# Altium PCB WCTopping.PcbDoc (part 1 of 2)
Units mil, origin at the board's own origin, x right, y up, seen from the top; angles counter-clockwise.
Board outline 6000 x 4000 mil, 2 copper layers (Top Layer, Bottom Layer); 59 components, 76 nets, 281 pads, 0 vias.
Unrouted connection lines stored in the file: 177.
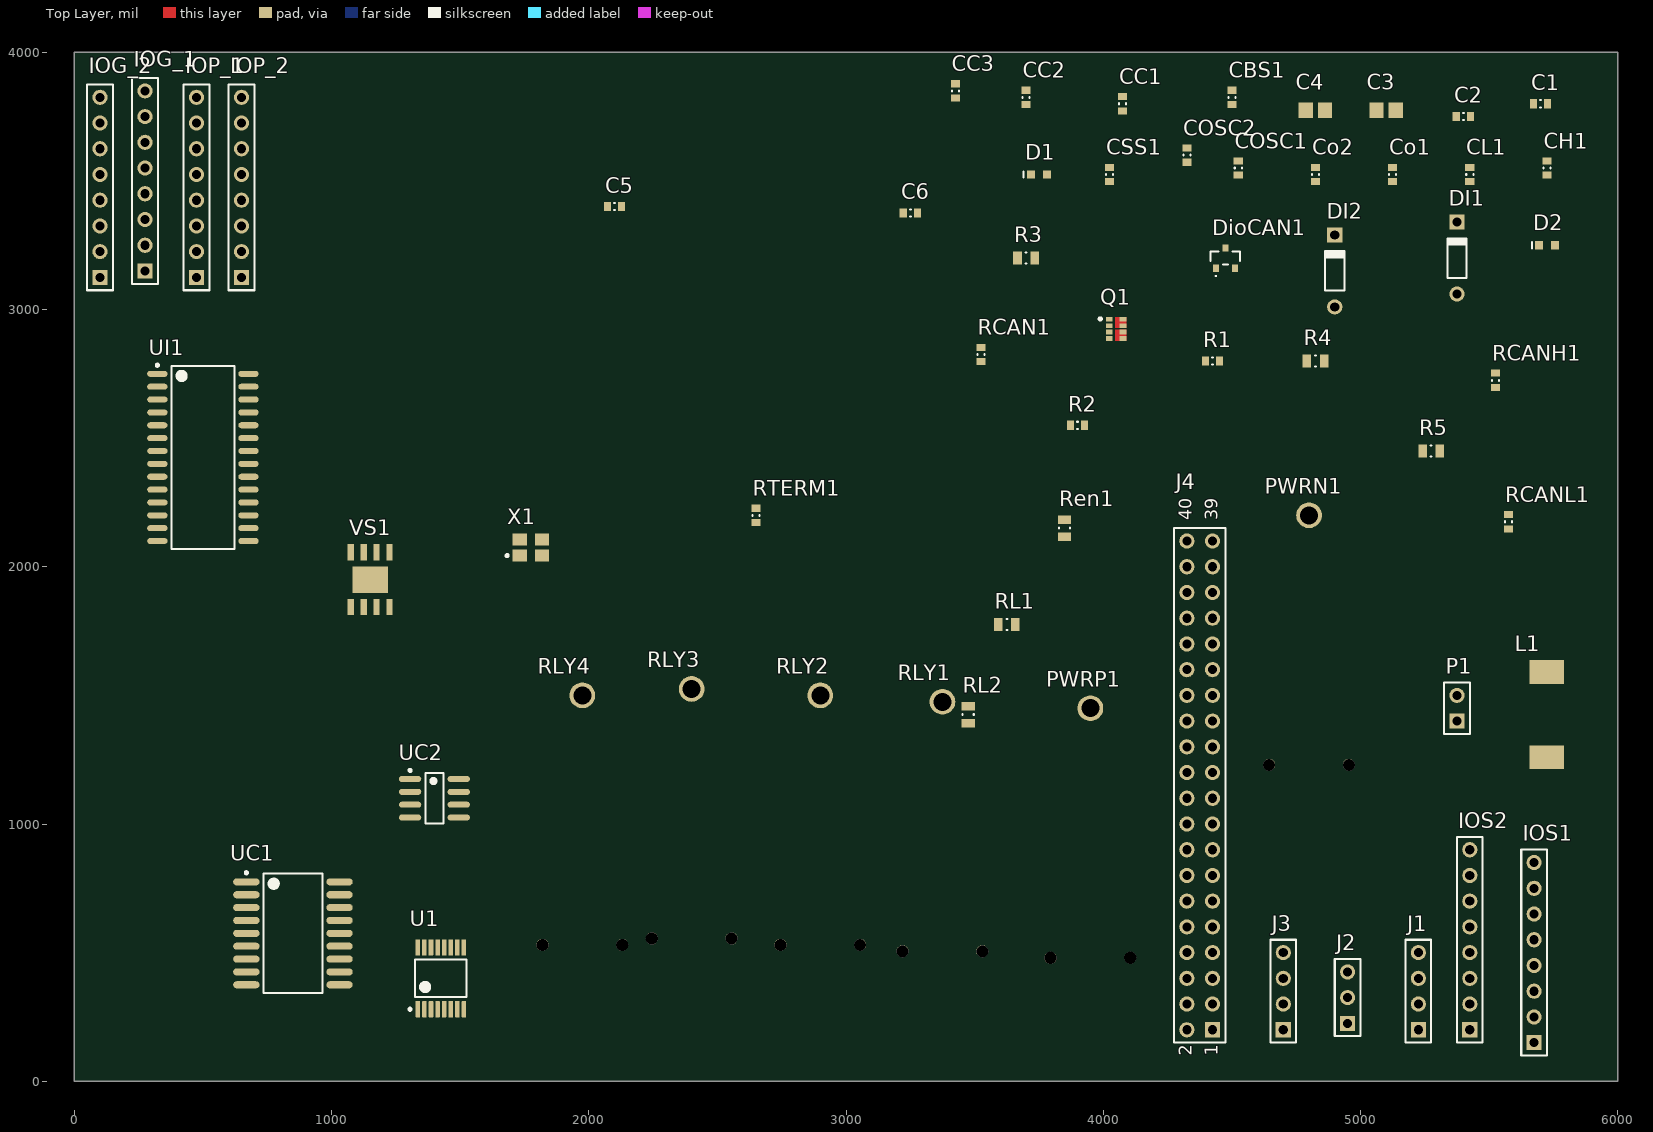
[diagram p0: Top Layer view]
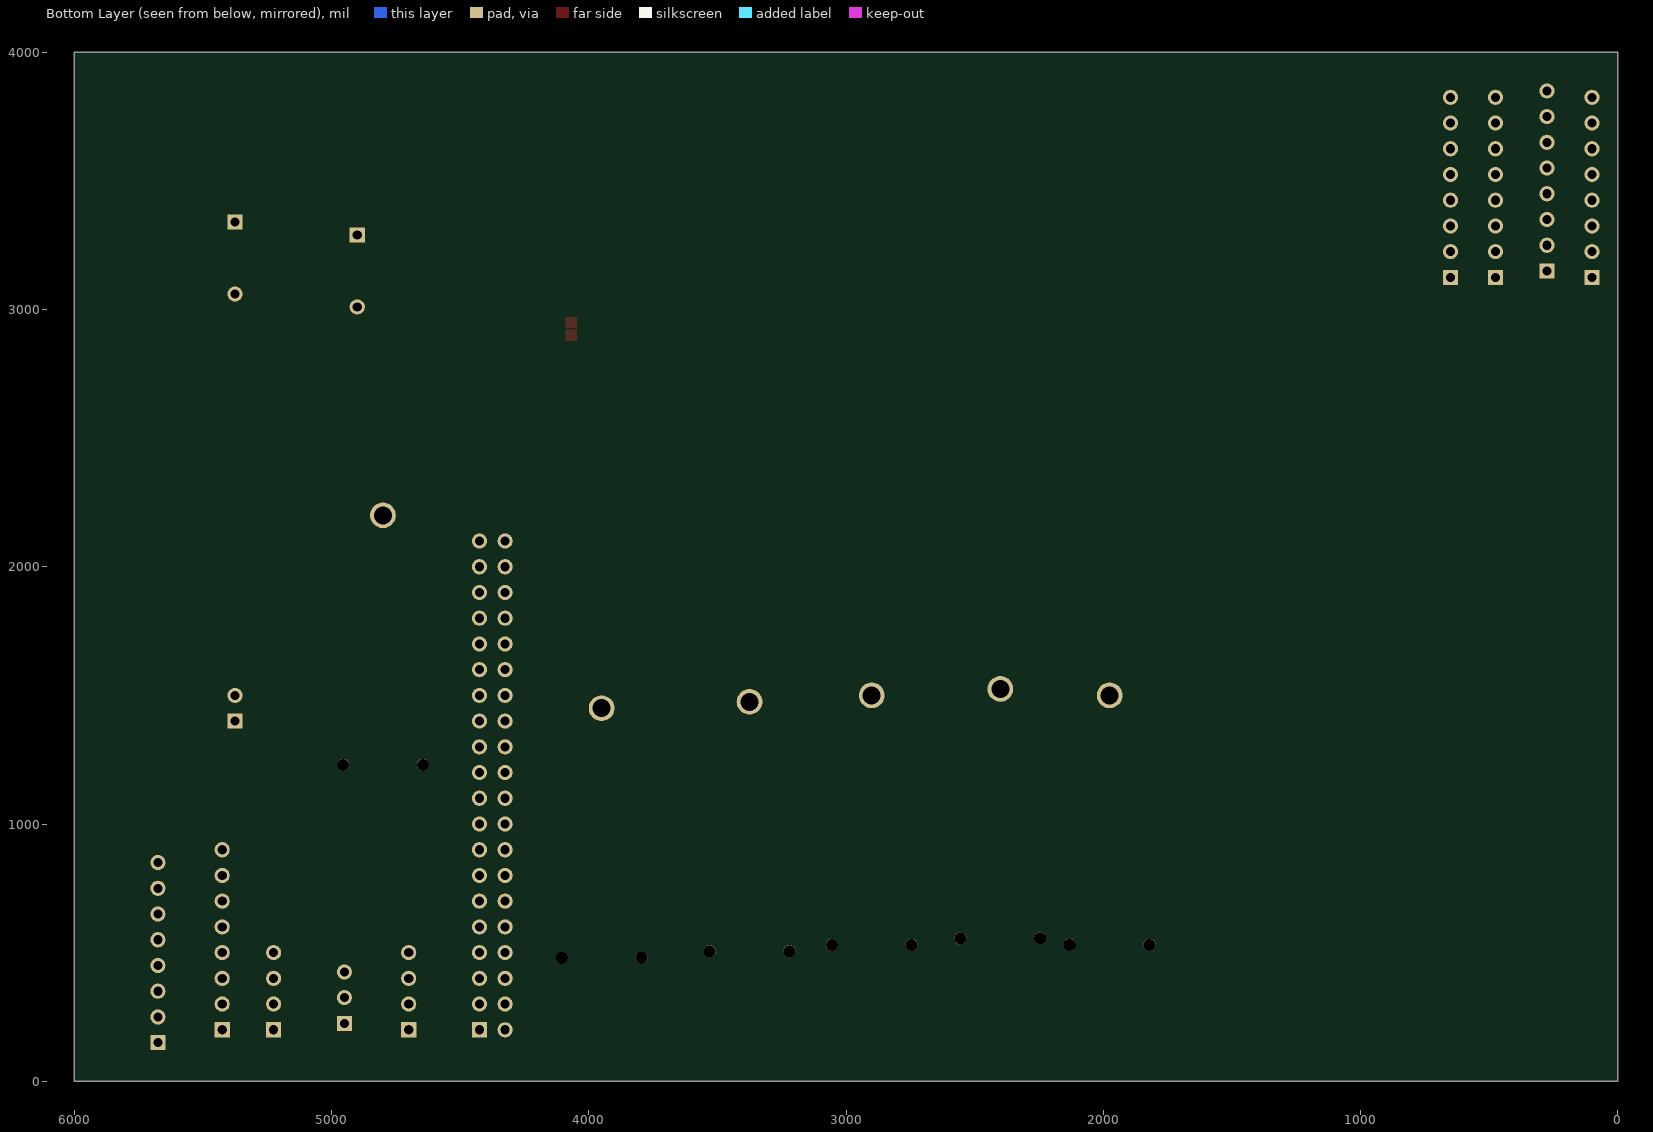
[diagram p1: Bottom Layer view, seen from below]

## Layer stack, top to bottom
Top Solder: solder mask 0.4, Solder Resist, Dk 3.5
Top Layer: signal copper 1.4
Dielectric 1: dielectric 12.6, FR-4, Dk 4.8
Bottom Layer: signal copper 1.4
Bottom Solder: solder mask 0.4, Solder Resist, Dk 3.5

## Board outline
0,0 6000,0 6000,4000 0,4000

## Design rules (kind name [scope] priority, off if disabled: settings)
Clearance [All] p1: gap=10 ignorepadtopadclearanceinfootprint=FALSE except(0: Arc-Hole Track-Hole SMDPad-Hole THPad-Hole Via-Hole Fill-Hole Poly-Hole Region-Hole Text-Hole)
PolygonConnect [All] p1: connectstyle=Relief reliefconductorwidth=10 reliefentries=4 polygonreliefangle="90 Angle" airgapwidth=10
RoutingVias [All] p1: holewidth=28 width=50 viastyle="Through Hole" minholewidth=28 minwidth=50 maxholewidth=28 maxwidth=50
SolderMaskExpansion [All] p1: expansion=4 istentingtop=FALSE
Width [All] p1: maxlimit=10 minlimit=10 preferedwidth=10
30 further rules are at their usual default settings.

## Classes and differential pairs
component class CAN_Interface: CC1 CC2 CH1 CL1 COSC1 COSC2 DioCAN1 P1 R1 R2 RCAN1 RCANH1 RCANL1 RTERM1 UC2 X1
component class Digital_IO: C1 C2 IOG_1 IOG_2 IOP_1 IOP_2 IOS1 IOS2 J1 J2 J3 UI1
component class "Power Supply": C3 C4 CBS1 CC3 Co1 Co2 CSS1 L1 PWRN1 PWRP1 R3 R4 R5 Ren1 VS1
component class Processor_Interface: C5 C6 J4
component class Relay_IO: D1 D2 DI1 DI2 Q1 RL1 RL2 RLY1 RLY2 RLY3 RLY4 U1
net class RELAY[1..2]: RELAY1 RELAY2

## Components (designator, comment, footprint, x,y, rotation, side; value= is the part's Value field where it differs from the comment)
C1 "100nF 50V" 0603C_L 5700,3800 r0 top
C2 "100nF 50V" 0603C_L 5400,3750 r0 top
C3 "10µF" CAPC2013X135X45ML10T25 5100,3775 r0 top
C4 "10µF" CAPC2013X135X45ML10T25 4825,3775 r0 top
C5 "100nF 50V" 0603C_L 2100,3400 r0 top
C6 "100nF 50V" 0603C_L 3250,3375 r0 top
CBS1 "10000pF 50V 0603" 0603C_L 4500,3825 r90 top
CC1 "0.1uF" 0603C_L 4075,3800 r90 top
CC2 "0.1uF" 0603C_L 3700,3825 r90 top
CC3 "3900pF" 0603C_L 3425,3850 r90 top
CH1 "560pF 25V 0603" 0603C_L 5725,3550 r90 top
CL1 "560pF 25V 0603" 0603C_L 5425,3525 r90 top
Co1 "22uF" 0603C_L 5125,3525 r90 top
Co2 "22uF" 0603C_L 4825,3525 r90 top
COSC1 "22pF" 0603C_L 4525,3550 r90 top
COSC2 "22pF" 0603C_L 4325,3600 r90 top
CSS1 "100nF 50V" 0603C_L 4025,3525 r90 top
D1 "LED Red" 0603_A 3750,3525 r0 top
D2 "LED Red" 0603_A 5725,3250 r0 top
DI1 "100V 1A Fast Diode" DO-35 5375,3200 r90 top
DI2 "100V 1A Fast Diode" DO-35 4900,3150 r90 top
DioCAN1 "100V 1A Fast Diode" SOT23 4475,3200 r90 top
IOG_1 "Header 8" HDR1X8 275,3150 r90 top
IOG_2 "Header 8" HDR1X8 100,3125 r90 top
IOP_1 "Header 8" HDR1X8 475,3125 r90 top
IOP_2 "Header 8" HDR1X8 650,3125 r90 top
IOS1 "Header 8" HDR1X8 5675,150 r90 top
IOS2 "Header 8" HDR1X8 5425,200 r90 top
J1 "Header 4" HDR1X4 5225,200 r90 top
J2 "Header 3" HDR1X3 4950,225 r90 top
J3 "Header 4" HDR1X4 4700,200 r90 top
J4 "Header 20X2" HDR2X20 4425,200 r90 top
L1 "10uH" IND_1 5725,1425 r90 top
P1 "Header 2" HDR1X2 5375,1400 r90 top
PWRN1 "BLK_PCB_RHT" Anderson_BLK_RHT_BOT 4800,2200 r90 top
PWRP1 "RED_PCB_RHT" Anderson_Red_RHT_BOT 3950,1450 r90 top
Q1 "NTHD4508NT1" ONSC-CHIPFET-8-1206A-03_S2_V 4050,2925 r0 top
R1 "10K 0603" 0603_L 4425,2800 r0 top
R2 "22K" 0603_L 3900,2550 r0 top
R3 "#NAME?" 0805_L 3700,3200 r0 top
R4 "10 kOhms" 0805_L 4825,2800 r0 top
R5 "6.8 kOhms" 0805_L 5275,2450 r0 top
RCAN1 "4.7K" 0603_L 3525,2825 r90 top
RCANH1 "100" 0603_L 5525,2725 r90 top
RCANL1 "100" 0603_L 5575,2175 r90 top
Ren1 "100K 0805" 0805_L 3850,2150 r90 top
RL1 "1K 0805" 0805_L 3625,1775 r0 top
RL2 "1K 0805" 0805_L 3475,1425 r90 top
RLY1 "Anderson-1Pin RED_PCB_RHT" Anderson_Red_RHT_BOT 3375,1475 r90 top
RLY2 "Anderson-1Pin BLK_PCB_RHT" Anderson_BLK_RHT_BOT 2900,1500 r90 top
RLY3 "Anderson-1Pin RED_PCB_RHT" Anderson_Red_RHT_BOT 2400,1525 r90 top
RLY4 "Anderson-1Pin BLK_PCB_RHT" Anderson_BLK_RHT_BOT 1975,1500 r90 top
RTERM1 "130ohm 0603" 0603_L 2650,2200 r90 top
U1 "CD40109BPW" PW0016A_M 1425,400 r90 top
UC1 "MCP2515-E/SO" SOIC-SO18_M 850,575 r0 top
UC2 "MCP2551-E/SN" SOIC-SN8_N 1400,1100 r0 top
UI1 "MCP23S17T-E/SO" SOIC-SO28_L 500,2425 r0 top
VS1 "MP2307" SOIC8N_EXP 1150,1950 r0 top
X1 "21C00047-16.000MHz" ITTI-21C00047-16.000MHz-4_V 1775,2075 r0 top

## Footprints (in the part's own frame and the unit in brackets; to place one, negate y for a bottom-side part, rotate by r counter-clockwise, add the part's x,y. Pads: shape width x height; smd on the part's side, far side on the other; paste and mask are expansions set on the pad)
0603_A [mm] "Chip LED, 2-Leads, Body 1.6x0.8mm, IPC Medium Density"
  rect 0.8x0.8 smd: 1(-0.8,0) 2(0.8,0)
  silkscreen extent -1.5,-0.3 -1.5,0.3, body extent -0.8,-0.4 0.8,0.4, height 0.7
0603_L [mm]
  rect 0.7x0.9 smd: 1(-0.7,0) 2(0.7,0)
  silkscreen extent -0.05,-0.35 0.05,0.35, body extent -0.85,-0.47 0.85,0.47, height 0.6
0603C_L [mm]
  rect 0.7x0.9 smd: 1(-0.7,0) 2(0.7,0)
  silkscreen extent -0.05,-0.35 0.05,0.35, body extent -0.87,-0.47 0.88,0.48, height 1
0805_L [mm]
  rect 0.85x1.3 smd: 1(-0.85,0) 2(0.85,0)
  silkscreen extent -0.05,-0.55 0.05,0.55, body extent -1.1,-0.67 1.1,0.68, height 0.7
Anderson_BLK_RHT_BOT [mil]
  round 100 hole 70: 1(0,0)
  round 47 hole 47 unplated: MH(-970,-155) MH(-970,155)
  body extent -1360,-155 25,155, height 310
Anderson_Red_RHT_BOT [mil]
  round 100 hole 70: 1(0,0)
  round 47 hole 47 unplated: MH(-970,-155) MH(-970,155)
  body extent -1360,-155 25,155, height 310
CAPC2013X135X45ML10T25 [mm] "Chip Capacitor, 2-Leads, Body 2.00x1.25mm, IPC Low Density"
  rect 1.4x1.5 smd: 1(-0.95,0) 2(0.95,0)
  body extent -1.05,-0.67 1.05,0.67, height 1.35
DO-35 [mm] "Diode, Axial; Body 3.8 x 1.9 mm (LxDia. max), Lead Dia. 0.53 mm (max)"
  round 1.5 hole 0.9: 1(-3.55,0)
  rect 1.5x1.5 hole 0.9: 2(3.55,0)
  silkscreen extent -1.95,-0.95 2.05,0.95
HDR1X2 [mm] "Connector; Header; 2 Position"
  rect 1.5x1.5 hole 0.9: 1(0,0)
  round 1.5 hole 0.9: 2(2.54,0)
  silkscreen extent -1.27,-1.27 3.81,1.27
HDR1X3 [mm] "Connector; Header; 3 Position"
  rect 1.5x1.5 hole 0.9: 1(0,0)
  round 1.5 hole 0.9: 2(2.54,0) 3(5.08,0)
  silkscreen extent -1.27,-1.27 6.35,1.27
HDR1X4 [mm] "Connector; Header; 4 Position"
  rect 1.5x1.5 hole 0.9: 1(0,0)
  round 1.5 hole 0.9: 2(2.54,0) 3(5.08,0) 4(7.62,0)
  silkscreen extent -1.27,-1.27 8.89,1.27
HDR1X8 [mm] "Connector; Header; 8 Position"
  rect 1.5x1.5 hole 0.9: 1(0,0)
  round 1.5 hole 0.9: 2(2.54,0) 3(5.08,0) 4(7.62,0) 5(10.16,0) 6(12.7,0) 7(15.24,0) 8(17.78,0)
  silkscreen extent -1.27,-1.27 19.05,1.27
HDR2X20 [mm] "Connector; Header; 20x2 Position"
  rect 1.5x1.5 hole 0.9: 1(0,0)
  round 1.5 hole 0.9: 2(0,2.54) 3(2.54,0) 4(2.54,2.54) 5(5.08,0) 6(5.08,2.54) 7(7.62,0) 8(7.62,2.54) 9(10.16,0) 10(10.16,2.54) 11(12.7,0) 12(12.7,2.54) 13(15.24,0) 14(15.24,2.54) 15(17.78,0) 16(17.78,2.54) 17(20.32,0) 18(20.32,2.54) 19(22.86,0) 20(22.86,2.54) 21(25.4,0) 22(25.4,2.54) 23(27.94,0) 24(27.94,2.54) 25(30.48,0) 26(30.48,2.54) 27(33.02,0) 28(33.02,2.54) 29(35.56,0) 30(35.56,2.54) 31(38.1,0) 32(38.1,2.54) 33(40.64,0) 34(40.64,2.54) 35(43.18,0) 36(43.18,2.54) 37(45.72,0) 38(45.72,2.54) 39(48.26,0) 40(48.26,2.54)
  silkscreen extent -1.27,-1.27 49.53,3.81
IND_1 [mil]
  rect 92.52x134 smd: 1(-165.5,0) 2(165.5,0)
  body extent -142,-127 142,135, height 118
ITTI-21C00047-16.000MHz-4_V [mm] "Hand Drawn, 4-Leads, Body 3.2x2.5 mm"
  rect 1.4x1.2 smd: 1(-1.1,-0.8) 2(1.1,-0.8) 3(1.1,0.8) 4(-1.1,0.8)
  silkscreen extent -2.47,-0.92 -2.23,-0.68, body extent -1.6,-1.25 1.6,1.25, height 0.9
ONSC-CHIPFET-8-1206A-03_S2_V [mil] "SON, 8-Leads, Body 3.025x1.625mm, Pitch 0.635mm"
  rect 25.98x17.99 smd: 1(-27.01,37.5) 2(-27.01,12.5) 3(-27.01,-12.5) 4(-27.01,-37.5) 5(27.01,-37.5) 6(27.01,-12.5) 7(27.01,12.5) 8(27.01,37.5)
  Top Layer region: -4.02,-46.5 40,-46.5 40,-3.5 -4.02,-3.5
  Top Layer region: -4.02,3.5 40,3.5 40,46.5 -4.02,46.5
  silkscreen extent -67,33 -57,43, body extent -32,-60 32,60, height 43
PW0016A_M [mm] "SOP, 16-Leads, Body 5.1x4.5mm, Pitch 0.65mm, IPC Low Density"
  rrect22% 1.6x0.45 smd: 1(-3.05,2.275) 2(-3.05,1.625) 3(-3.05,0.975) 4(-3.05,0.325) 5(-3.05,-0.325) 6(-3.05,-0.975) 7(-3.05,-1.625) 8(-3.05,-2.275) 9(3.05,-2.275) 10(3.05,-1.625) 11(3.05,-0.975) 12(3.05,-0.325) 13(3.05,0.325) 14(3.05,0.975) 15(3.05,1.625) 16(3.05,2.275)
  silkscreen extent -3.17,-2.55 1.85,3.17, body extent -3.21,-2.5 3.21,2.5, height 1
SOIC8N_EXP [mil]
  rect 24x63 smd: 1(-75,-106.5) 2(-25,-106.5) 3(25,-106.5) 4(75,-106.5) 5(75,106.5) 6(25,106.5) 7(-25,106.5) 8(-75,106.5)
  rect 138x103 smd: EP(0,0)
SOIC-SN8_N [mm] "SOIC, 8-Leads, Body 4.9x3.9mm, Pitch 1.27mm, IPC Medium Density"
  oval 2.2x0.6 smd: 1(-2.4,1.905) 2(-2.4,0.635) 3(-2.4,-0.635) 4(-2.4,-1.905) 5(2.4,-1.905) 6(2.4,-0.635) 7(2.4,0.635) 8(2.4,1.905)
  silkscreen extent -2.52,-2.5 0.9,2.88, body extent -2,-2.5 2,2.5, height 1.75
SOIC-SO18_M [mm] "SOIC, 18-Leads, Body 11.6x7.5mm, Pitch 1.27mm, IPC Low Density"
  oval 2.6x0.7 smd: 1(-4.6,5.08) 2(-4.6,3.81) 3(-4.6,2.54) 4(-4.6,1.27) 5(-4.6,0) 6(-4.6,-1.27) 7(-4.6,-2.54) 8(-4.6,-3.81) 9(-4.6,-5.08) 10(4.6,-5.08) 11(4.6,-3.81) 12(4.6,-2.54) 13(4.6,-1.27) 14(4.6,0) 15(4.6,1.27) 16(4.6,2.54) 17(4.6,3.81) 18(4.6,5.08)
  silkscreen extent -4.72,-5.9 2.9,6.1, body extent -3.8,-5.87 3.8,5.87, height 2.65
SOIC-SO28_L [mm] "SOIC, 28-Leads, Body 17.9x7.5mm, Pitch 1.27mm, IPC High Density"
  oval 2x0.6 smd: 1(-4.5,8.255) 2(-4.5,6.985) 3(-4.5,5.715) 4(-4.5,4.445) 5(-4.5,3.175) 6(-4.5,1.905) 7(-4.5,0.635) 8(-4.5,-0.635) 9(-4.5,-1.905) 10(-4.5,-3.175) 11(-4.5,-4.445) 12(-4.5,-5.715) 13(-4.5,-6.985) 14(-4.5,-8.255) 15(4.5,-8.255) 16(4.5,-6.985) 17(4.5,-5.715) 18(4.5,-4.445) 19(4.5,-3.175) 20(4.5,-1.905) 21(4.5,-0.635) 22(4.5,0.635) 23(4.5,1.905) 24(4.5,3.175) 25(4.5,4.445) 26(4.5,5.715) 27(4.5,6.985) 28(4.5,8.255)
  silkscreen extent -4.62,-9.05 3.1,9.23, body extent -3.8,-9.05 3.8,9.05, height 2.65
SOT23 [mm]
  rect 0.7x0.6 smd paste-0.05: 1(-1,0.95) 2(-1,-0.95) 3(1,0)
  silkscreen extent -1.79,-1.45 0.65,1.45, body extent -1.3,-1.5 1.3,1.5, height 1.1

## Part data
C1 C2 C5 C6 CSS1: library part Cap100nF_50V_0603, Capacitance=0.10µF, Manufacturer=Yageo, Manufacturer Part Number=CC0603ZRY5V9BB104, Operating Temperature="-30°C ~ 85°C", Package / Case="0603 (1608 Metric)", Ratings=-, Supplier Part Number 1=311-1343-1-ND, Temperature Coefficient="Y5V (F)", Tolerance="-20%, +80%", Voltage - Rated=50V, Applications="General Purpose", Category=Capacitors, ComponentLink1Description=http://www.yageo.com/documents/recent/UPY-GPHC_Y5V_6.3V-to-50V_6.pdf, ComponentLink1URL=http://www.yageo.com/documents/recent/UPY-GPHC_Y5V_6.3V-to-50V_6.pdf, Failure Rate=-, Features=-, Height - Seated (Max)=-, Lead Spacing=-, Lead Style=-, Mounting Type="Surface Mount, MLCC", Packaging="Cut Tape (CT)", Part Status=Active, Pricing 1="1=0.1, 10=0.018, 25=0.0128, 100=0.0082, 250=0.00672, 500=0.00574, 1000=0.00447 (USD)", RoHS="RoHS Compliant", Size / Dimension="0.063\" L x 0.031\" W (1.60mm x 0.80mm)", Stock 1=1827128, Supplier 1=Digi-Key, Thickness (Max)="0.035\" (0.90mm)"
C3 C4: library part CMP-2007-03541-1, Manufacturer=Murata, Manufacturer Part Number=GRM21BR61E106KA73L, Operating Temperature="-55°C ~ 85°C", Package / Case="0805 (2012 Metric)", Ratings=-, Standard Package=1, Supplier Part Number 1=490-5523-1-ND, Temperature Coefficient=X5R, Tolerance=±10%, Voltage - Rated=25V, Applications="General Purpose", Capacitance=10µF, Catalog Drawings="GRM Series_0805_1.25", Category=Capacitors, ComponentLink1Description=https://datasheet.ciiva.com/139/partnumbering-e-01-139184.pdf, ComponentLink1URL=https://datasheet.ciiva.com/139/partnumbering-e-01-139184.pdf, ComponentLink2Description=https://datasheet.ciiva.com/28584/626718-28584288.pdf, ComponentLink2URL=https://datasheet.ciiva.com/28584/626718-28584288.pdf, ComponentLink3Description=https://datasheet.ciiva.com/16440/grm21br61e106ka73l-16440627.pdf, ComponentLink3URL=https://datasheet.ciiva.com/16440/grm21br61e106ka73l-16440627.pdf, ComponentLink4Description=https://datasheet.ciiva.com/7719/1747469-7719093.pdf, ComponentLink4URL=https://datasheet.ciiva.com/7719/1747469-7719093.pdf, ComponentLink5Description=https://datasheet.ciiva.com/5424/product-5424327.pdf, ComponentLink5URL=https://datasheet.ciiva.com/5424/product-5424327.pdf, ComponentLink6Description=https://datasheet.ciiva.com/28584/626718-28584279.pdf, ComponentLink6URL=https://datasheet.ciiva.com/28584/626718-28584279.pdf, ComponentLink7Description=https://datasheet.ciiva.com/14116/grmseries-highdielectrictype-eng-14116376.pdf, ComponentLink7URL=https://datasheet.ciiva.com/14116/grmseries-highdielectrictype-eng-14116376.pdf, ComponentLink8Description=https://datasheet.ciiva.com/22774/1747469-22774396.pdf, ComponentLink8URL=https://datasheet.ciiva.com/22774/1747469-22774396.pdf, ComponentLink9Description=https://datasheet.ciiva.com/139/partnumbering-e-01-139182.pdf, ComponentLink9URL=https://datasheet.ciiva.com/139/partnumbering-e-01-139182.pdf, ComponentLink10Description=https://datasheet.ciiva.com/139/partnumbering-e-01-139183.pdf, ComponentLink10URL=https://datasheet.ciiva.com/139/partnumbering-e-01-139183.pdf, ComponentLink11Description=https://datasheet.ciiva.com/29199/454623-da-01-en-vs-kondensator-0805-29199615.pdf, ComponentLink11URL=https://datasheet.ciiva.com/29199/454623-da-01-en-vs-kondensator-0805-29199615.pdf, Family="Ceramic Capacitors", Features=-, Height - Seated (Max)=-, Lead Spacing=-, Lead Style=-, Mounting Type="Surface Mount, MLCC", Online Catalog="GRM Series", Other Names=490-5523-6, Packaging=Digi-Reel®, Part Number=GRM21BR61E106KA73L, Pricing 1="1=0.19, 10=0.13, 50=0.0748, 100=0.0618, 250=0.052, 500=0.0436, 1000=0.0358 (USD)", Product Training Modules="High-Cap Multilayer Ceramic Capacitors", Series=GRM, Size / Dimension="0.079\" L x 0.049\" W (2.00mm x 1.25mm)", Stock 1=750766, Supplier 1=Digikey, Thickness (Max)="0.053\" (1.35mm)"
CBS1: library part Cap10000pF_50V_0603, Capacitance=10000pF, Manufacturer=Yageo, Manufacturer Part Number=CC0603KRX7R9BB103, Operating Temperature="-55°C ~ 125°C", Package / Case="0603 (1608 Metric)", Ratings=-, Standard Package=1, Supplier Part Number 1=311-1085-1-ND, Temperature Coefficient=X7R, Tolerance=±10%, Voltage - Rated=50V, Applications="General Purpose", Category=Capacitors, ComponentLink1Description=https://datasheet.ciiva.com/8033/1734573-8033861.pdf, ComponentLink1URL=https://datasheet.ciiva.com/8033/1734573-8033861.pdf, ComponentLink2Description=https://datasheet.ciiva.com/176/mlccorderingcode-176550.pdf, ComponentLink2URL=https://datasheet.ciiva.com/176/mlccorderingcode-176550.pdf, ComponentLink3Description=https://datasheet.ciiva.com/11788/0900766b8079c870-11788374.pdf, ComponentLink3URL=https://datasheet.ciiva.com/11788/0900766b8079c870-11788374.pdf, ComponentLink4Description=https://datasheet.ciiva.com/176/mlccorderingcode-176551.pdf, ComponentLink4URL=https://datasheet.ciiva.com/176/mlccorderingcode-176551.pdf, ComponentLink5Description=https://datasheet.ciiva.com/13389/upy-gphc-x7r-6-3v-to-50v-8-13389991.pdf, ComponentLink5URL=https://datasheet.ciiva.com/13389/upy-gphc-x7r-6-3v-to-50v-8-13389991.pdf, ComponentLink6Description=https://datasheet.ciiva.com/176/mlccorderingcode-176552.pdf, ComponentLink6URL=https://datasheet.ciiva.com/176/mlccorderingcode-176552.pdf, ComponentLink7Description=https://datasheet.ciiva.com/8033/1734573-8033816.pdf, ComponentLink7URL=https://datasheet.ciiva.com/8033/1734573-8033816.pdf, ComponentLink8Description=https://datasheet.ciiva.com/8033/70765-8033817.pdf, ComponentLink8URL=https://datasheet.ciiva.com/8033/70765-8033817.pdf, ComponentLink9Description=https://datasheet.ciiva.com/16625/upy-gphc-x7r-6-3v-to-50v-8-16625529.pdf, ComponentLink9URL=https://datasheet.ciiva.com/16625/upy-gphc-x7r-6-3v-to-50v-8-16625529.pdf, ComponentLink10Description=https://datasheet.ciiva.com/28450/1489800-28450619.pdf, ComponentLink10URL=https://datasheet.ciiva.com/28450/1489800-28450619.pdf, ComponentLink11Description=https://datasheet.ciiva.com/26862/getdatasheetpartid-403582-26862846.pdf, ComponentLink11URL=https://datasheet.ciiva.com/26862/getdatasheetpartid-403582-26862846.pdf, Family="Ceramic Capacitors", Featured Product="Commodity Multilayer Ceramic Capacitors – CC Series", Features=-, Height - Seated (Max)=-, Lead Spacing=-, Lead Style=-, Mounting Type="Surface Mount, MLCC", Online Catalog="CC Series", Other Names=311-1085-6, Packaging=Digi-Reel®, Pricing 1="1=0.1, 10=0.018, 25=0.0132, 50=0.0098, 100=0.008, 250=0.0067, 500=0.0057, 1000=0.0045 (USD)", Product Training Modules="Multilayer Ceramic Capacitors", Series=CC, Size / Dimension="0.063\" L x 0.031\" W (1.60mm x 0.80mm)", Stock 1=2765337, Supplier 1=Digikey, Thickness (Max)="0.035\" (0.90mm)"
CC1 CC2: library part Cap10uF_25V_0603
CC3: library part Cap_0603_1, Case Style="Ceramic Chip", Manufacturer=Murata, Manufacturer Part Number=GRM188R71E392KA01D, Operating Temp Range="-55C to 125C", Package / Case=0603, Supplier Part Number 1=490-11525-1-ND, Temp Coeff (Dielectric)=X7R, Tolerance (+ or -)=10%, Voltage=25VDC, Capacitance=3900pF, ComponentLink1Description=https://datasheet.ciiva.com/5420/product-5420128.pdf, ComponentLink1URL=https://datasheet.ciiva.com/5420/product-5420128.pdf, ComponentLink2Description=https://datasheet.ciiva.com/164/partnumbering-e-01-164755.pdf, ComponentLink2URL=https://datasheet.ciiva.com/164/partnumbering-e-01-164755.pdf, Construction="SMT Chip", Failure Rate="Not Required", Mounting Style="Surface Mount", Packaging="Tape and Reel", Pricing 1="1=0.1, 10=0.072, 50=0.039, 100=0.033, 250=0.027, 500=0.0231, 1000=0.018 (USD)", Product Depth (mm)=0.8mm, Product Diameter (mm)="Not Requiredmm", Product Height (mm)=0.8mm, Product Length (mm)=1.6mm, Stock 1=12327, Supplier 1=Digikey, Wire Form="Not Required"
CH1 CL1: library part Cap10uF_25V_0603, Capacitance=10µF, Manufacturer="Taiyo Yuden", Manufacturer Part Number=TMK316F106ZL-T, Operating Temperature="-30°C ~ 85°C", Package / Case="1206 (3216 Metric)", Ratings=-, Standard Package=1, Supplier Part Number 1=587-1353-1-ND, Temperature Coefficient="Y5V (F)", Tolerance="-20%, +80%", Voltage - Rated=25V, Applications="General Purpose", Catalog Drawings="xMK Series_1206_1.6", Category=Capacitors, ComponentLink1Description=https://datasheet.ciiva.com/30217/73tmk316f106zl-t-30217817.pdf, ComponentLink1URL=https://datasheet.ciiva.com/30217/73tmk316f106zl-t-30217817.pdf, ComponentLink2Description=https://datasheet.ciiva.com/11596/tmk316f106zl-t-ss-11596490.pdf, ComponentLink2URL=https://datasheet.ciiva.com/11596/tmk316f106zl-t-ss-11596490.pdf, ComponentLink3Description=https://datasheet.ciiva.com/137/tmk316f106zl-t-ss-137061.pdf, ComponentLink3URL=https://datasheet.ciiva.com/137/tmk316f106zl-t-ss-137061.pdf, ComponentLink4Description=https://datasheet.ciiva.com/15922/1123tmk316f106zl-t-15922467.pdf, ComponentLink4URL=https://datasheet.ciiva.com/15922/1123tmk316f106zl-t-15922467.pdf, ComponentLink5Description=https://datasheet.ciiva.com/7975/746258-7975854.pdf, ComponentLink5URL=https://datasheet.ciiva.com/7975/746258-7975854.pdf, ComponentLink6Description=https://datasheet.ciiva.com/7975/1693457-7975853.pdf, ComponentLink6URL=https://datasheet.ciiva.com/7975/1693457-7975853.pdf, ComponentLink7Description=https://datasheet.ciiva.com/5744/1497285-5744889.pdf, ComponentLink7URL=https://datasheet.ciiva.com/5744/1497285-5744889.pdf, Family="Ceramic Capacitors", Features=-, Height - Seated (Max)=-, Lead Spacing=-, Lead Style=-, Mounting Type="Surface Mount, MLCC", Online Catalog="M Series", Other Names=587-1353-6, Packaging=Digi-Reel®, Pricing 1="1=0.34, 10=0.255, 50=0.1488, 100=0.119, 250=0.085, 500=0.0578, 1000=0.0468 (USD)", Series=M, Size / Dimension="0.126\" L x 0.063\" W (3.20mm x 1.60mm)", Stock 1=330483, Supplier 1=Ciiva, Thickness (Max)="0.071\" (1.80mm)"
Co1 Co2: library part Cap_0603_1, Case Style="Ceramic Chip", Manufacturer=Murata, Manufacturer Part Number=GRM188R60J226MEA0D, Operating Temp Range="-55C to 125C", Package / Case=0603, Supplier Part Number 1=490-7611-1-ND, Temp Coeff (Dielectric)=X5R, Tolerance (+ or -)=20%, Voltage=6.3VDC, Capacitance=22uF, ComponentLink1Description=https://datasheet.ciiva.com/29540/partnumbering-e-01-29540441.pdf, ComponentLink1URL=https://datasheet.ciiva.com/29540/partnumbering-e-01-29540441.pdf, ComponentLink2Description=https://datasheet.ciiva.com/29540/partnumbering-e-01-29540442.pdf, ComponentLink2URL=https://datasheet.ciiva.com/29540/partnumbering-e-01-29540442.pdf, ComponentLink3Description=https://datasheet.ciiva.com/29540/partnumbering-e-01-29540443.pdf, ComponentLink3URL=https://datasheet.ciiva.com/29540/partnumbering-e-01-29540443.pdf, Construction="SMT Chip", Failure Rate="Not Required", Mounting Style="Surface Mount", Packaging="Tape and Reel", Pricing 1="1=0.27, 10=0.182, 50=0.11, 100=0.0924, 250=0.0748, 500=0.066, 1000=0.0561 (USD)", Product Depth (mm)=0.8mm, Product Diameter (mm)="Not Requiredmm", Product Height (mm)=0.8mm, Product Length (mm)=1.6mm, Stock 1=2044559, Supplier 1=Digikey, Wire Form="Not Required"
COSC1 COSC2: library part Cap100nF_50V_0603, Capacitance=22, Case/Package=0603, Case Code (Metric)=1608, Manufacturer=Murata, Manufacturer Part Number=GRM1885C1H220JA01D, Max Operating Temperature=125, Min Operating Temperature=-55, Package Quantity=1, Supplier Part Number 1=490-1411-1-ND, Tolerance=5, Type (Capacitors)=C0G, Voltage Rating=50, Case Code (Imperial)=0603, ComponentLink1Description=https://datasheet.ciiva.com/131/product-131760.pdf, ComponentLink1URL=https://datasheet.ciiva.com/131/product-131760.pdf, ComponentLink2Description=https://datasheet.ciiva.com/131/partnumbering-e-01-131761.pdf, ComponentLink2URL=https://datasheet.ciiva.com/131/partnumbering-e-01-131761.pdf, ComponentLink3Description=https://datasheet.ciiva.com/14116/grmseries-tc-hitype-eng-14116853.pdf, ComponentLink3URL=https://datasheet.ciiva.com/14116/grmseries-tc-hitype-eng-14116853.pdf, ComponentLink4Description=https://datasheet.ciiva.com/3776/1156grm1885c1h220ja0123-3776984.pdf, ComponentLink4URL=https://datasheet.ciiva.com/3776/1156grm1885c1h220ja0123-3776984.pdf, ComponentLink5Description=https://datasheet.ciiva.com/14116/grmseries-tc-hitype-eng-14116826.pdf, ComponentLink5URL=https://datasheet.ciiva.com/14116/grmseries-tc-hitype-eng-14116826.pdf, ComponentLink6Description=https://datasheet.ciiva.com/11786/0900766b807a1cab-11786398.pdf, ComponentLink6URL=https://datasheet.ciiva.com/11786/0900766b807a1cab-11786398.pdf, ComponentLink7Description=https://datasheet.ciiva.com/131/partnumbering-e-01-131759.pdf, ComponentLink7URL=https://datasheet.ciiva.com/131/partnumbering-e-01-131759.pdf, Height=0.8, Lead Pitch=4, Length=1.6, Mount="Surface Mount", Packaging="Cut Tape", Pins=2, Pricing 1="1=0.1, 10=0.061, 50=0.0332, 100=0.0281, 250=0.023, 500=0.0196, 1000=0.0153 (USD)", Radiation Hardening=No, REACH SVHC="No SVHC", Stock 1=517556, Supplier 1=Digikey, Voltage Rating (DC)=50, Width=0.8
D1 D2: library part LED_Red0603, "SMD mono-color Chip LED, WL-SMCW, Red", Color=Red, Current - Test=20mA, Lens Color=Colorless, Manufacturer="Wurth Electronics Inc", Manufacturer Part Number=150060RS75000, Millicandela Rating=250mcd, Package / Case="0603 (1608 Metric)", Supplier Device Package=0603, Supplier Part Number 1=732-4978-1-ND, Voltage - Forward (Vf) (Typ)=2V, Category=Optoelectronics, ComponentLink1Description=http://katalog.we-online.de/led/datasheet/150060RS75000.pdf, ComponentLink1URL=http://katalog.we-online.de/led/datasheet/150060RS75000.pdf, Features=-, Height (Max)=0.80mm, Lens Style/Size="Rectangle with Flat Top, 1.10mm x 0.70mm", Lens Transparency=Clear, Mounting Type="Surface Mount", Packaging="Cut Tape (CT)", Pricing 1="1=0.24, 50=0.21, 100=0.192, 500=0.174, 1000=0.162 (USD)", RoHS="RoHS Compliant", Size / Dimension="1.60mm L x 0.80mm W", Stock 1=22059, Supplier 1=Digi-Key, Viewing Angle=140°, Wavelength - Dominant=625nm, Wavelength - Peak=630nm
DI1 DI2: library part "Diode 1N4148", "High Conductance Fast Diode", Diode Case Style=DO-204AL, Forward Current If(AV)=1A, Forward Surge Current Ifsm Max=35A, Forward Voltage VF Max=1.25V, Manufacturer="ON Semiconductor", Manufacturer Part Number=MUR110RLG, Operating Temperature Max=175°C, Repetitive Reverse Voltage Vrrm Max=100V, Supplier Part Number 1=MUR110RLGOSCT-ND, ComponentLink1Description=https://datasheet.ciiva.com/915/mur120-d-915616.pdf, ComponentLink1URL=https://datasheet.ciiva.com/915/mur120-d-915616.pdf, ComponentLink2Description=https://datasheet.ciiva.com/30479/0900766b812212ee-30479481.pdf, ComponentLink2URL=https://datasheet.ciiva.com/30479/0900766b812212ee-30479481.pdf, ComponentLink3Description=https://datasheet.ciiva.com/25950/mur120-d-25950702.pdf, ComponentLink3URL=https://datasheet.ciiva.com/25950/mur120-d-25950702.pdf, ComponentLink4Description=https://datasheet.ciiva.com/16474/mur120-d-16474333.pdf, ComponentLink4URL=https://datasheet.ciiva.com/16474/mur120-d-16474333.pdf, ComponentLink5Description=https://datasheet.ciiva.com/915/mur120-d-915618.pdf, ComponentLink5URL=https://datasheet.ciiva.com/915/mur120-d-915618.pdf, ComponentLink6Description=https://datasheet.ciiva.com/915/mur120-d-915619.pdf, ComponentLink6URL=https://datasheet.ciiva.com/915/mur120-d-915619.pdf, ComponentLink7Description=https://datasheet.ciiva.com/16208/mur120-d-16208137.pdf, ComponentLink7URL=https://datasheet.ciiva.com/16208/mur120-d-16208137.pdf, Diode Configuration=Single, Diode Type="Fast Recovery", No. of Pins=2, Packaging=Each, Pricing 1="1=0.48, 10=0.362, 100=0.2254, 500=0.1541, 1000=0.1185 (USD)", Reverse Recovery Time trr Max=75ns, Stock 1=22453, Supplier 1=Ciiva, SVHC="No SVHC (16-Jun-2014)"
DioCAN1: library part PESD1CAN, "High Conductance Fast Diode", Diode Case Style=DO-204AL, Forward Current If(AV)=1A, Forward Surge Current Ifsm Max=35A, Forward Voltage VF Max=1.25V, Manufacturer="ON Semiconductor", Manufacturer Part Number=MUR110RLG, Operating Temperature Max=175°C, Repetitive Reverse Voltage Vrrm Max=100V, Supplier Part Number 1=MUR110RLGOSCT-ND, ComponentLink1Description=https://datasheet.ciiva.com/915/mur120-d-915616.pdf, ComponentLink1URL=https://datasheet.ciiva.com/915/mur120-d-915616.pdf, ComponentLink2Description=https://datasheet.ciiva.com/30479/0900766b812212ee-30479481.pdf, ComponentLink2URL=https://datasheet.ciiva.com/30479/0900766b812212ee-30479481.pdf, ComponentLink3Description=https://datasheet.ciiva.com/25950/mur120-d-25950702.pdf, ComponentLink3URL=https://datasheet.ciiva.com/25950/mur120-d-25950702.pdf, ComponentLink4Description=https://datasheet.ciiva.com/16474/mur120-d-16474333.pdf, ComponentLink4URL=https://datasheet.ciiva.com/16474/mur120-d-16474333.pdf, ComponentLink5Description=https://datasheet.ciiva.com/915/mur120-d-915618.pdf, ComponentLink5URL=https://datasheet.ciiva.com/915/mur120-d-915618.pdf, ComponentLink6Description=https://datasheet.ciiva.com/915/mur120-d-915619.pdf, ComponentLink6URL=https://datasheet.ciiva.com/915/mur120-d-915619.pdf, ComponentLink7Description=https://datasheet.ciiva.com/16208/mur120-d-16208137.pdf, ComponentLink7URL=https://datasheet.ciiva.com/16208/mur120-d-16208137.pdf, Diode Configuration=Single, Diode Type="Fast Recovery", No. of Pins=2, Packaging=Each, Pricing 1="1=0.48, 10=0.362, 100=0.2254, 500=0.1541, 1000=0.1185 (USD)", Reverse Recovery Time trr Max=75ns, Stock 1=22453, Supplier 1=Ciiva, SVHC="No SVHC (16-Jun-2014)"
IOG_1 IOG_2 IOP_1 IOP_2 IOS1 IOS2: "Header, 8-Pin", LatestRevisionDate=17-Jul-2002, LatestRevisionNote="Re-released for DXP Platform.", Publisher="Altium Limited"
J1 J3: "Header, 4-Pin", LatestRevisionDate=17-Jul-2002, LatestRevisionNote="Re-released for DXP Platform.", Publisher="Altium Limited"
J2: "Header, 3-Pin", LatestRevisionDate=17-Jul-2002, LatestRevisionNote="Re-released for DXP Platform.", Publisher="Altium Limited"
J4: "Header, 20-Pin, Dual row", LatestRevisionDate=17-Jul-2002, LatestRevisionNote="Re-released for DXP Platform.", Publisher="Altium Limited"
L1: library part Inductor, "Inductor", Inductance="10 uH", Manufacturer=Abracon, Manufacturer Part Number=ASPI-0630LR-100M-T15, Maximum DC Current="4 A", Maximum DC Resistance="68 mOhm", Package/Case=2826, Supplier Part Number 1=ASPI-0630LR-100M-T15CT-ND, Tolerance="20 %", Category="Inductor Surface Mount", Code_IEC=1005, Code_JEITA=0402, ComponentLink1Description=https://datasheet.ciiva.com/29994/aspi-0630lr-29994299.pdf, ComponentLink1URL=https://datasheet.ciiva.com/29994/aspi-0630lr-29994299.pdf, LatestRevisionDate=29-May-2009, LatestRevisionNote="IPC-7351 Footprint Added.", PackageDescription="Chip Inductor", Packaging="Tape & Reel", Pricing 1="1=0.81, 10=0.706, 25=0.6552, 50=0.5544, 100=0.504, 250=0.4738, 500=0.4234 (USD)", Product Depth="6.65 mm", Product Height="3(Max) mm", Published=8-Jun-2000, Publisher="Altium Limited", Rad Hard=No, Stock 1=9671, Supplier 1=Digikey, Type=Power
P1: "Header, 2-Pin", LatestRevisionDate=17-Jul-2002, LatestRevisionNote="Re-released for DXP Platform.", Publisher="Altium Limited"
PWRN1: library part "Anderson-1Pin BLK_PCB_RHT", "1 pin Anderson", Current Rating="25 A", Manufacturer="Anderson Power Products (APP)", Manufacturer Part Number="1377G1, 1377G2, 1327-BK,137G6-BK", Supplier Part Number 1=879-1377G1, Voltage Rating="600 V", ComponentLink1Description=http://components.arrow.com/part/dataview/0323_01933244, ComponentLink1URL=http://components.arrow.com/part/dataview/0323_01933244, ComponentLink2Description=http://www.andersonpower.com/files.php?file=CAT-PPMP(4).pdf, ComponentLink2URL=http://www.andersonpower.com/files.php?file=CAT-PPMP(4).pdf, Contact Material="Copper Alloy", Contact Plating=Tin, Mouser=879-1327G6, Number of Positions / Contacts=1, Pricing 1="1=1.14, 10=1.14, 50=0.947, 100=0.901, 1000=0.777, 10000=0.777 (USD)", Product Type=Contacts, Series="PCB Powerpole", Stock 1=233, Supplier 1=Mouser, Supplier Part Number 2=879-1377G2, Supplier Part Number 3=879-1327G6, Supplier Part Number 4=879-1327, Termination Style=Solder
PWRP1: library part "Anderson-1Pin RED_PCB_RHT", "1 pin Anderson", Current Rating="25 A", Manufacturer="Anderson Power Products (APP)", Manufacturer Part Number="1377G1, 1377G2, 1327-BK,137G6-BK", Supplier Part Number 1=879-1377G1, Voltage Rating="600 V", ComponentLink1Description=http://components.arrow.com/part/dataview/0323_01933244, ComponentLink1URL=http://components.arrow.com/part/dataview/0323_01933244, ComponentLink2Description=http://www.andersonpower.com/files.php?file=CAT-PPMP(4).pdf, ComponentLink2URL=http://www.andersonpower.com/files.php?file=CAT-PPMP(4).pdf, Contact Material="Copper Alloy", Contact Plating=Tin, Mouser=879-1327G6, Number of Positions / Contacts=1, Pricing 1="1=1.14, 10=1.14, 50=0.947, 100=0.901, 1000=0.777, 10000=0.777 (USD)", Product Type=Contacts, Series="PCB Powerpole", Stock 1=233, Supplier 1=Mouser, Supplier Part Number 2=879-1377G2, Supplier Part Number 3=879-1327G6, Supplier Part Number 4=879-1327, Termination Style=Solder
Q1: "Power MOSFET, 20 V, 4.1 A, Dual N-Channel, 8-Pin CHIPFET, Tape and Reel", Current - Continuous Drain (Id) @ 25°C=3A, Drain to Source Voltage (Vdss)=20V, Input Capacitance (Ciss) @ Vds="180pF @ 10V", Manufacturer="On Semiconductor", Manufacturer Part Number=NTHD4508NT1G, Operating Temperature="-55°C ~ 150°C (TJ)", Package / Case="8-SMD, Flat Lead", Package Type=ChipFET-8, Power - Max=1.13W, Supplier Device Package=ChipFET™, Supplier Part Number 1=NTHD4508NT1GOSCT-ND, Category="Discrete Semiconductor Products", Channel Polarity="N Channel", Ciss Typ (pF)=180, ComponentLink1Description="Manufacturer URL", ComponentLink1URL=http://www.onsemi.com/, ComponentLink2Description=Datasheet, ComponentLink2URL=http://www.onsemi.com/pub_link/Collateral/NTHD4508N-D.PDF, ComponentLink3Description="Package Specification", ComponentLink3URL=http://www.onsemi.com/pub_link/Collateral/NTHC5513-D.PDF, Configuration=Dual, Coss Typ (pF)=80, Crss Typ (pF)=25, DatasheetVersion="Rev. 3", FET Feature="Logic Level Gate", FET Type="2 N-Channel (Dual)", Gate Charge (Qg) @ Vgs="4nC @ 4.5V", ID Max (A)=4.1, Mounting Technology="Surface Mount", Mounting Type="Surface Mount", PackageDescription="8-Pin ChipFET, Body 3.025 x 1.625 mm, Pitch 0.635 mm", PackageReference=CHIPFET-8-1206A-03_S2, PackageVersion="Rev. E, 10/2004", Packaging="Cut Tape (CT)", Packing="Tape and Reel", PartId=1, PartNumber=NTHD4508NT1, Part Status=Active, Pricing 1="1=0.53, 10=0.457, 100=0.3416, 500=0.26832, 1000=0.20685 (USD)", Qrr Typ (nC)=6, Rds On (Max) @ Id, Vgs="75 mOhm @ 3.1A, 4.5V", RoHS="RoHS Compliant", Stock 1=6850, Supplier 1=Digi-Key, V(BR)DSS Min (V)=20, Vgs(th) (Max) @ Id="1.2V @ 250µA", VGS(th) Max (V)=1.2, VGS Max (V)=12
R1: library part Res4K99_0603, Manufacturer=Yageo, Manufacturer Part Number=RT0603DRD074K99L, Operating Temperature="-55°C ~ 155°C", Package / Case="0603 (1608 Metric)", Power (Watts)="0.1W, 1/10W", Resistance (Ohms)=10K, Supplier Device Package=0603, Supplier Part Number 1=311-10KDCT-ND, Temperature Coefficient=±25ppm/°C, Tolerance=±0.5%, Category=Resistors, ComponentLink1Description=http://www.yageo.com/documents/recent/PYu-RT_1-to-0.05_RoHS_L_6.pdf, ComponentLink1URL=http://www.yageo.com/documents/recent/PYu-RT_1-to-0.05_RoHS_L_6.pdf, Composition="Thin Film", Failure Rate=-, Features="Moisture Resistant", Height="0.022\" (0.55mm)", Number of Terminations=2, Packaging="Cut Tape (CT)", Part Status=Active, Pricing 1="1=0.22, 10=0.184, 25=0.134, 100=0.0721, 250=0.05532, 500=0.04358, 1000=0.03018, 2500=0.02766 (USD)", RoHS="RoHS Compliant", Size / Dimension="0.063\" L x 0.031\" W (1.60mm x 0.80mm)", Stock 1=28874, Supplier 1=Digi-Key
R2: library part Res_0603, Case Code - in=0603, Case Code - mm=1608, Manufacturer=Yageo, Manufacturer Part Number=RT0603DRD0722KL, Operating Temperature Range="- 55 C to + 125 C", Package / Case="0603 (1608 metric)", Power Rating="100 mW", Resistance="22 kOhms", Supplier Part Number 1=311-22KDDKR-ND, Temperature Coefficient="25 PPM / C", Tolerance="0.5 %", Voltage Rating="75 V", Brand=Yageo, ComponentLink1Description=https://datasheet.ciiva.com/12810/pyu-rt-1-to-0-05-rohs-l-4-12810773.pdf, ComponentLink1URL=https://datasheet.ciiva.com/12810/pyu-rt-1-to-0-05-rohs-l-4-12810773.pdf, Height="0.45 mm", Length="1.6 mm", Packaging=Reel, Pricing 1="1=0.12, 10=0.104, 25=0.0716, 50=0.0558, 100=0.0399, 250=0.0311, 500=0.0247, 1000=0.0175 (USD)", Product="Thin Film Resistors SMD", Product Category="Thin Film Resistors - SMD", RoHS=True, Series=RT, Stock 1=39729, Supplier 1=Digikey, Termination Style=SMD/SMT, Type="High Precision, High Stability", Unit Weight="0.000071 oz", Width="0.8 mm"
R3: library part Res_0805, Manufacturer=Yageo, Manufacturer Part Number=RC0805FR-0744K2L, Operating Temperature="-55°C ~ 155°C", Package / Case="0805 (2012 Metric)", Power (Watts)="0.125W, 1/8W", Resistance (Ohms)=44.2k, Standard Package=1, Supplier Device Package=0805, Supplier Part Number 1=311-44.2KCRCT-ND, Temperature Coefficient=±100ppm/°C, Tolerance=±1%, Catalog Drawings="Thick Film Resistor Side", Category=Resistors, ComponentLink1Description=https://datasheet.ciiva.com/2519/pyu-r-int-thick-7-2519792.pdf, ComponentLink1URL=https://datasheet.ciiva.com/2519/pyu-r-int-thick-7-2519792.pdf, ComponentLink2Description=https://datasheet.ciiva.com/2519/pyu-r-int-thick-7-2519793.pdf, ComponentLink2URL=https://datasheet.ciiva.com/2519/pyu-r-int-thick-7-2519793.pdf, ComponentLink3Description=https://datasheet.ciiva.com/2519/pyu-r-int-thick-7-2519794.pdf, ComponentLink3URL=https://datasheet.ciiva.com/2519/pyu-r-int-thick-7-2519794.pdf, ComponentLink4Description=https://datasheet.ciiva.com/17074/rc0805-17074805.pdf, ComponentLink4URL=https://datasheet.ciiva.com/17074/rc0805-17074805.pdf, Composition="Thick Film", EDA / CAD Models="Download from Accelerated Designs", Family="Chip Resistor - Surface Mount", Features="Moisture Resistant", Height="0.024\" (0.60mm)", HTML Datasheet="RC Series, L Suffix Datasheet.html", Kits="PHC5A-KIT-ND  - RESISTOR KIT 10K-97.6K 1/8W PHC5-KIT-ND  - RESISTOR KIT 10K-97.6K 1/8W", Number of Terminations=2, Online Catalog="RC0805 Series", Other Names=311-44.2KCRCT, Packaging="Cut Tape (CT)", PCN Other="RC/AC 0603/0805/1206 22/Jan/2013", Pricing 1="1=0.1, 10=0.019, 25=0.0136, 50=0.0104, 100=0.0077, 250=0.0058, 500=0.0047, 1000=0.0035 (USD)", Product Training Modules="Chip Resistor", Series=RC, Size / Dimension="0.079\" L x 0.049\" W (2.00mm x 1.25mm)", Stock 1=52103, Supplier 1=Digikey
R4: library part Res_0805, Case Code - in=0805, Case Code - mm=2012, Manufacturer=Yageo, Manufacturer Part Number=RC0805FR-0710KL, Operating Temperature Range="- 55 C to + 155 C", Power Rating="125 mW (1/8 W)", Supplier Part Number 1=311-10.0KCRCT-ND, Temperature Coefficient="100 PPM / C", Tolerance="1 %", Voltage Rating="150 V", ComponentLink1Description=https://datasheet.ciiva.com/11808/0900766b8106beab-11808151.pdf, ComponentLink1URL=https://datasheet.ciiva.com/11808/0900766b8106beab-11808151.pdf, ComponentLink2Description=https://datasheet.ciiva.com/12669/rc0805-12669688.pdf, ComponentLink2URL=https://datasheet.ciiva.com/12669/rc0805-12669688.pdf, ComponentLink3Description=https://datasheet.ciiva.com/46447/444164-46447563.pdf, ComponentLink3URL=https://datasheet.ciiva.com/46447/444164-46447563.pdf, ComponentLink4Description=https://datasheet.ciiva.com/2456/pyu-r-int-thick-7-2456972.pdf, ComponentLink4URL=https://datasheet.ciiva.com/2456/pyu-r-int-thick-7-2456972.pdf, ComponentLink5Description=https://datasheet.ciiva.com/2456/pyu-r-int-thick-7-2456973.pdf, ComponentLink5URL=https://datasheet.ciiva.com/2456/pyu-r-int-thick-7-2456973.pdf, ComponentLink6Description=https://datasheet.ciiva.com/2456/pyu-r-int-thick-7-2456974.pdf, ComponentLink6URL=https://datasheet.ciiva.com/2456/pyu-r-int-thick-7-2456974.pdf, ComponentLink7Description=https://datasheet.ciiva.com/16747/rc0805-16747087.pdf, ComponentLink7URL=https://datasheet.ciiva.com/16747/rc0805-16747087.pdf, Packaging=Reel, Pricing 1="1=0.1, 10=0.019, 25=0.0136, 50=0.0104, 100=0.0077, 250=0.0058, 500=0.0047, 1000=0.0035 (USD)", Product="Thick Film Resistors General Purpose", Resistance="10 kOhms", Series=RC, Stock 1=8894385, Supplier 1=Digikey, Termination Style=SMD/SMT
R5: library part Res_0805, Case Code - in=0805, Case Code - mm=2012, Manufacturer=Yageo, Manufacturer Part Number=RC0805JR-076K8L, Operating Temperature Range="- 55 C to + 155 C", Power Rating="125 mW (1/8 W)", Supplier Part Number 1=311-6.8KARCT-ND, Temperature Coefficient="100 PPM / C", Tolerance="5 %", Voltage Rating="150 V", ComponentLink1Description=https://datasheet.ciiva.com/2456/pyu-r-int-thick-7-2456128.pdf, ComponentLink1URL=https://datasheet.ciiva.com/2456/pyu-r-int-thick-7-2456128.pdf, ComponentLink2Description=https://datasheet.ciiva.com/2456/pyu-r-int-thick-7-2456129.pdf, ComponentLink2URL=https://datasheet.ciiva.com/2456/pyu-r-int-thick-7-2456129.pdf, ComponentLink3Description=https://datasheet.ciiva.com/2456/pyu-r-int-thick-7-2456130.pdf, ComponentLink3URL=https://datasheet.ciiva.com/2456/pyu-r-int-thick-7-2456130.pdf, ComponentLink4Description=https://datasheet.ciiva.com/17196/rc0805-17196091.pdf, ComponentLink4URL=https://datasheet.ciiva.com/17196/rc0805-17196091.pdf, ComponentLink5Description=https://datasheet.ciiva.com/7941/442941-7941997.pdf, ComponentLink5URL=https://datasheet.ciiva.com/7941/442941-7941997.pdf, ComponentLink6Description=https://datasheet.ciiva.com/7941/442941-7941998.pdf, ComponentLink6URL=https://datasheet.ciiva.com/7941/442941-7941998.pdf, ComponentLink7Description=https://datasheet.ciiva.com/12666/rc0805-12666991.pdf, ComponentLink7URL=https://datasheet.ciiva.com/12666/rc0805-12666991.pdf, Packaging=Reel, Pricing 1="1=0.1, 10=0.016, 25=0.0116, 50=0.009, 100=0.0066, 250=0.005, 500=0.004, 1000=0.003 (USD)", Product="Thick Film Resistors General Purpose", Resistance="6.8 kOhms", Series=RC, Stock 1=71971, Supplier 1=Digikey, Termination Style=SMD/SMT
RCAN1: library part Res4K99_0603, Manufacturer=Yageo, Manufacturer Part Number=RT0603DRD074K99L, Operating Temperature="-55°C ~ 155°C", Package / Case="0603 (1608 Metric)", Power (Watts)="0.1W, 1/10W", Resistance (Ohms)=4.99k, Supplier Device Package=0603, Supplier Part Number 1=311-4.99KDCT-ND, Temperature Coefficient=±25ppm/°C, Tolerance=±0.5%, Category=Resistors, ComponentLink1Description=http://www.yageo.com/documents/recent/PYu-RT_1-to-0.05_RoHS_L_6.pdf, ComponentLink1URL=http://www.yageo.com/documents/recent/PYu-RT_1-to-0.05_RoHS_L_6.pdf, Composition="Thin Film", Failure Rate=-, Features="Moisture Resistant", Height="0.022\" (0.55mm)", Number of Terminations=2, Packaging="Cut Tape (CT)", Part Status=Active, Pricing 1="1=0.22, 10=0.184, 25=0.134, 100=0.0721, 250=0.05532, 500=0.04358, 1000=0.03018, 2500=0.02766 (USD)", RoHS="RoHS Compliant", Size / Dimension="0.063\" L x 0.031\" W (1.60mm x 0.80mm)", Stock 1=28874, Supplier 1=Digi-Key
RCANH1 RCANL1: library part Res330_0603, Manufacturer=Yageo, Manufacturer Part Number=RC0603JR-07330RL, Operating Temperature="-55°C ~ 155°C", Package / Case="0603 (1608 Metric)", Power (Watts)="0.1W, 1/10W", Resistance (Ohms)=330, Supplier Device Package=0603, Supplier Part Number 1=311-330GRCT-ND, Temperature Coefficient=±100ppm/°C, Tolerance=±5%, Category=Resistors, ComponentLink1Description=http://www.yageo.com/documents/recent/PYu-RC_Group_51_RoHS_L_04.pdf, ComponentLink1URL=http://www.yageo.com/documents/recent/PYu-RC_Group_51_RoHS_L_04.pdf, Composition="Thick Film", Failure Rate=-, Features="Moisture Resistant", Height="0.022\" (0.55mm)", Number of Terminations=2, Packaging="Cut Tape (CT)", Part Status=Active, Pricing 1="1=0.1, 10=0.011, 25=0.008, 100=0.0044, 250=0.00336, 500=0.0027, 1000=0.00198, 2500=0.00172 (USD)", RoHS="RoHS Compliant", Size / Dimension="0.063\" L x 0.031\" W (1.60mm x 0.80mm)", Stock 1=1303594, Supplier 1=Digi-Key
Ren1: library part Res100K_080, Manufacturer="Panasonic / Panasonic ECG", Manufacturer Part Number=ERJ-6GEYJ104V, Rated Power="0.125 W", Resistance="100 kO", Supplier Part Number 1=P100KACT-ND, Temp Coefficient="±200 ppm/°C", Tolerance (%)="±5 %", ComponentLink1Description=https://datasheet.ciiva.com/11821/0900766b80f806dd-11821506.pdf, ComponentLink1URL=https://datasheet.ciiva.com/11821/0900766b80f806dd-11821506.pdf, ComponentLink2Description=https://datasheet.ciiva.com/16771/70255313-16771462.pdf, ComponentLink2URL=https://datasheet.ciiva.com/16771/70255313-16771462.pdf, ComponentLink3Description=https://datasheet.ciiva.com/43460/1500035-43460136.pdf, ComponentLink3URL=https://datasheet.ciiva.com/43460/1500035-43460136.pdf, ComponentLink4Description=https://datasheet.ciiva.com/22758/1500035-22758234.pdf, ComponentLink4URL=https://datasheet.ciiva.com/22758/1500035-22758234.pdf, ComponentLink5Description=https://datasheet.ciiva.com/17208/aoa0000ce1-17208156.pdf, ComponentLink5URL=https://datasheet.ciiva.com/17208/aoa0000ce1-17208156.pdf, ComponentLink6Description=https://datasheet.ciiva.com/30137/4aoa0000ce1-30137389.pdf, ComponentLink6URL=https://datasheet.ciiva.com/30137/4aoa0000ce1-30137389.pdf, ComponentLink7Description=https://datasheet.ciiva.com/9117/aoa0000ce1-9117374.pdf, ComponentLink7URL=https://datasheet.ciiva.com/9117/aoa0000ce1-9117374.pdf, ComponentLink8Description=https://datasheet.ciiva.com/34303/2007290-34303759.pdf, ComponentLink8URL=https://datasheet.ciiva.com/34303/2007290-34303759.pdf, ComponentLink9Description=https://datasheet.ciiva.com/46380/1500035-46380511.pdf, ComponentLink9URL=https://datasheet.ciiva.com/46380/1500035-46380511.pdf, Pricing 1="1=0.1, 50=0.015, 100=0.011, 250=0.0084, 500=0.0067, 1000=0.005 (USD)", Size Code=0805, Stock 1=748133, Supplier 1=Digikey
RL1 RL2: library part Res1K_0805, Manufacturer="Panasonic Electronic Components", Manufacturer Part Number=ERJ-6GEYJ102V, Operating Temperature="-55°C ~ 155°C", Package / Case="0805 (2012 Metric)", Power (Watts)="0.125W, 1/8W", Resistance (Ohms)=1k, Supplier Device Package=0805, Supplier Part Number 1=P1.0KACT-ND, Temperature Coefficient=±200ppm/°C, Tolerance=±5%, Category=Resistors, ComponentLink1Description=http://industrial.panasonic.com/www-cgi/jvcr13pz.cgi?E+PZ+3+AOA0001+ERJ6GEYJ102V+7+WW, ComponentLink1URL=http://industrial.panasonic.com/www-cgi/jvcr13pz.cgi?E+PZ+3+AOA0001+ERJ6GEYJ102V+7+WW, Composition="Thick Film", Failure Rate=-, Features="Automotive AEC-Q200", Height="0.028\" (0.70mm)", Number of Terminations=2, Packaging="Cut Tape (CT)", Part Status=Active, Pricing 1="1=0.1, 50=0.015, 100=0.011, 250=0.0084, 500=0.00674, 1000=0.00496 (USD)", RoHS="RoHS Compliant", Size / Dimension="0.079\" L x 0.049\" W (2.00mm x 1.25mm)", Stock 1=1669380, Supplier 1=Digi-Key
RLY1 RLY2 RLY3 RLY4: "1 pin Anderson", Current Rating="25 A", Manufacturer="Anderson Power Products (APP)", Manufacturer Part Number="1377G1, 1377G2, 1327-BK,137G6-BK", Supplier Part Number 1=879-1377G2, Voltage Rating="600 V", ComponentLink1Description=http://components.arrow.com/part/dataview/0323_01933244, ComponentLink1URL=http://components.arrow.com/part/dataview/0323_01933244, ComponentLink2Description=http://www.andersonpower.com/files.php?file=CAT-PPMP(4).pdf, ComponentLink2URL=http://www.andersonpower.com/files.php?file=CAT-PPMP(4).pdf, Contact Material="Copper Alloy", Contact Plating=Tin, Mouser=879-1327G6, Number of Positions / Contacts=1, Pricing 1="1=1.14, 10=1.14, 50=0.947, 100=0.901, 1000=0.777, 10000=0.777 (USD)", Product Type=Contacts, Series="PCB Powerpole", Stock 1=233, Supplier 1=Mouser, Termination Style=Solder
  RLY1 RLY3: Supplier Part Number 2=879-1327
  RLY2 RLY4: Supplier Part Number 2=879-1327G6
RTERM1: library part Res330_0603
U1: library part CMP-1527-00010-2, "CMOS Quad Low-to-High Voltage Level Shifter, 3 to 18 V, -55 to 125 degC, 16-Pin TSSOP (PW16), RoHS, Tube", Manufacturer="Texas Instruments", Manufacturer Part Number=CD40109BPWR, Operating Temperature="-55°C ~ 125°C", Package / Case="16-TSSOP (0.173\", 4.40mm Width)", Package Reference=PW0016A, Standard Package=1, Supplier Device Package=16-TSSOP, Supplier Part Number 1=296-12163-6-ND, Temperature Range="-55 to 125 degC", Voltage - Supply="3 V ~ 18 V", Category="Integrated Circuits (ICs)", ComponentLink1Description="Manufacturer URL", ComponentLink1URL=www.ti.com, ComponentLink2Description=Datasheet, ComponentLink2URL=http://www.ti.com/lit/ds/symlink/cd40109b.pdf, ComponentLink3Description="Package Specification", ComponentLink3URL=http://www.ti.com/lit/ml/mpds361/mpds361.pdf, ComponentLink4Description=https://datasheet.ciiva.com/1899/cd40109b-1899236.pdf, ComponentLink4URL=https://datasheet.ciiva.com/1899/cd40109b-1899236.pdf, ComponentLink5Description=https://datasheet.ciiva.com/1899/cd40109b-1899237.pdf, ComponentLink5URL=https://datasheet.ciiva.com/1899/cd40109b-1899237.pdf, ComponentLink6Description=https://datasheet.ciiva.com/1899/cd40109b-1899238.pdf, ComponentLink6URL=https://datasheet.ciiva.com/1899/cd40109b-1899238.pdf, ComponentLink7Description=https://datasheet.ciiva.com/15096/getdatasheetpartid-50246-15096137.pdf, ComponentLink7URL=https://datasheet.ciiva.com/15096/getdatasheetpartid-50246-15096137.pdf, ComponentLink8Description=https://datasheet.ciiva.com/41455/001015415-da-01-en-ic-quad-lo-hi-v-cd40109bpwr-tssop-16-tid-41455340.pdf, ComponentLink8URL=https://datasheet.ciiva.com/41455/001015415-da-01-en-ic-quad-lo-hi-v-cd40109bpwr-tssop-16-tid-41455340.pdf, ComponentLink9Description=https://datasheet.ciiva.com/3305/cd40109b-mil-3305133.pdf, ComponentLink9URL=https://datasheet.ciiva.com/3305/cd40109b-mil-3305133.pdf, Data Rate=-, DatasheetVersion=SCHS099B, Differential - Input:Output=No/No, Dynamic Catalog=4000B, Family="Logic - Translators", Input Type=Voltage, Logic Function="Level Shifter, 3-State", Mounting Technology="Surface Mount", Number of Bits=4, Number of Channels=4, Number of Outputs=4, Number of Outputs/Channel=1, Other Names=296-12163-6, Output Type=Voltage, PackageDescription="16-Pin Plastic Small Outline Package, Body 5 x 4.4 mm, Pitch 0.65 mm", PackageVersion=4040064-4/G, Packaging=Digi-Reel®, Packing=Tube, PartNumber=CD40109BPW, Pricing 1="1=0.42, 10=0.36, 100=0.2688, 500=0.2111, 1000=0.1628 (USD)", Propagation Delay="240 ns Max.", Propagation Delay (Max)=240ns, RoHS=TRUE, Series=4000B, Stock 1=11025, Supplier 1=Digikey, VSS="3 to 18 V"
UC1: library part CMP-0186-00035-2, "Stand-Alone CAN Controller With SPI Interface, 18-Pin SOIC, Extended Temperature", Code_JEDEC=MS-013, ComponentLink1Description="Manufacturer URL", ComponentLink1URL=http://www.microchip.com/, ComponentLink2Description=Datasheet, ComponentLink2URL=http://ww1.microchip.com/downloads/en/DeviceDoc/21801f.pdf, ComponentLink3Description="Package Specification", ComponentLink3URL=http://www.microchip.com/stellent/groups/techpub_sg/documents/packagingspec/en012702.pdf, DatasheetVersion="revF, Oct-2010", PackageDescription="18-Lead Plastic Small Outline (SO) - Wide 7.50mm Body [SOIC]", PackageReference=SOIC-SO18, PackageVersion="revBB, Aug-2009", RevisionNote="URLs added. DatasheetVersion updated."